# EAGLE board untitled (EAGLE 9.6.2)
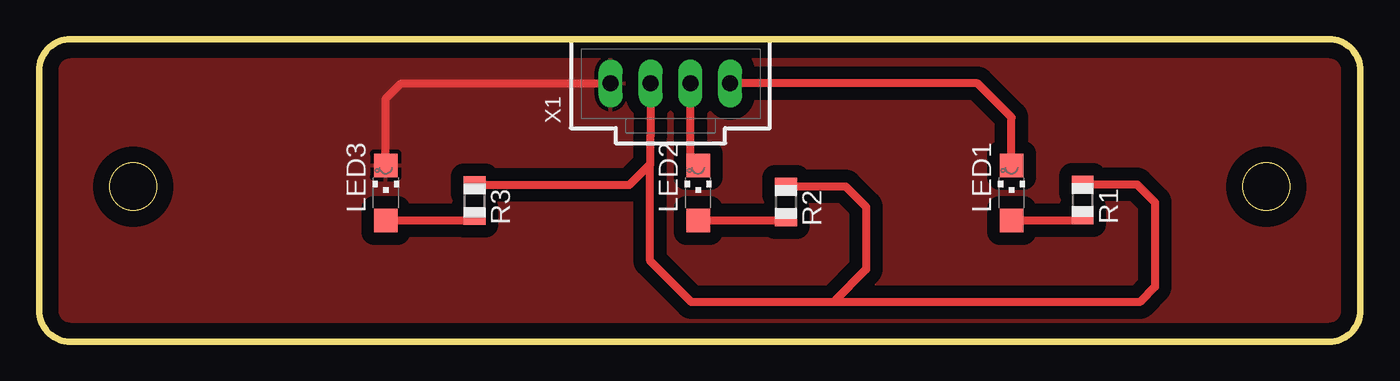
[diagram p0: board, top side]

Size 84.3 x 19.3 mm. Coordinates in mm from the lower left corner, seen from the top.
Outline: 2,0 82.3,0 arc90 84.3,2 84.3,17.3 arc90 82.3,19.3 2,19.3 arc90 0,17.3 0,2 arc90 2,0
Outline: circle at 6,9.9 radius 1.5
Outline: circle at 78.3,9.9 radius 1.5
Copper layers (1*16): Top 0.035mm / dielectric 1.5mm / Bottom 0.035mm
Design rules "default": minimum track width 6mil, minimum drill 0.35mm, track to track 6mil, track to pad 6mil, pad to pad 6mil, via to via 6mil, smd to smd 6mil, copper to edge 40mil, drill to drill 6mil, minimum pad ring 10mil, minimum via ring 8mil, stop-mask expansion 4mil, vias tented up to drill 0mil, thermal gap 10mil

## Footprints (pad centres in the part's own frame; a part is rotated, then mirrored left to right if it is on the bottom)
CHIPLED_1206 = smd 1.5 x 1.5: A 0,-1.75; C 0,1.75
R0805 = smd 1.1 x 1.4: 1 -1,0; 2 1,0
70543-04 = drill 1.016 long: 1 -3.81,0; 2 -1.27,0; 3 1.27,0; 4 3.81,0

## Placement (x,y rotation side)
LED1  [CHIPLED_1206]  62.04,9.5 0 top
LED2  [CHIPLED_1206]  42.04,9.5 0 top
LED3  [CHIPLED_1206]  22.12,9.5 0 top
R1  [R0805]  66.58,9.04 270 top
R2  [R0805]  47.65,8.91 270 top
R3  [R0805]  27.78,9 270 top
X1  C-GRID-04-70543  [70543-04]  40.28,16.48 0 top

## Library data of the parts
LED1-LED3 R1-R3 = adafruit
X1 = con-molex; MF: MOLEX; OC_FARNELL: unknown; OC_NEWARK: unknown

## Nets
GND: LED3.C X1.1
N$1: LED2.C X1.3
N$2: LED1.C X1.4
N$3: R1.1 R2.1 R3.1 X1.2
N$4: LED1.A R1.2
N$5: LED2.A R2.2
N$6: LED3.A R3.2

## Tracks (layer width: path | path; a pad name or v marks a point on that pad's centre or on a via)
GND
  Top 0.508: LED3.C 22.12,15.5 23.1,16.48 X1.1
  pour Top (isolate 0.813): 0,19.3 84.3,19.3 84.3,0 0,0
N$1
  Top 0.508: LED2.C 41.55,11.74 X1.3
N$2
  Top 0.508: LED1.C 62.04,14.31 59.87,16.48 X1.4
N$3
  Top 0.508: R3.1 37.66,10 38.98,11.32 | X1.2 39.01,13.16 38.98,13.13 38.98,11.32 | R2.1 51.45,9.91 52.76,8.6 52.76,4.62 50.67,2.53 | 50.67,2.53 50.23,2.53 41.61,2.53 38.98,5.16 38.98,11.32 | R1.1 70.05,10.04 71.2,8.88 71.2,3.51 70.22,2.53 50.67,2.53
N$4
  Top 0.508: LED1.A 66.29,7.75 R1.2
N$5
  Top 0.508: LED2.A 47.49,7.75 R2.2
N$6
  Top 0.508: LED3.A 27.53,7.75 R3.2